# Altium PCB PCB_TEST.PcbDoc
Units mil, origin at the board's own origin, x right, y up, seen from the top; angles counter-clockwise.
Board outline 1410.03 x 1130.03 mil, 2 copper layers (Top Layer, Bottom Layer); 4 components, 2 nets, 10 pads, 0 vias.
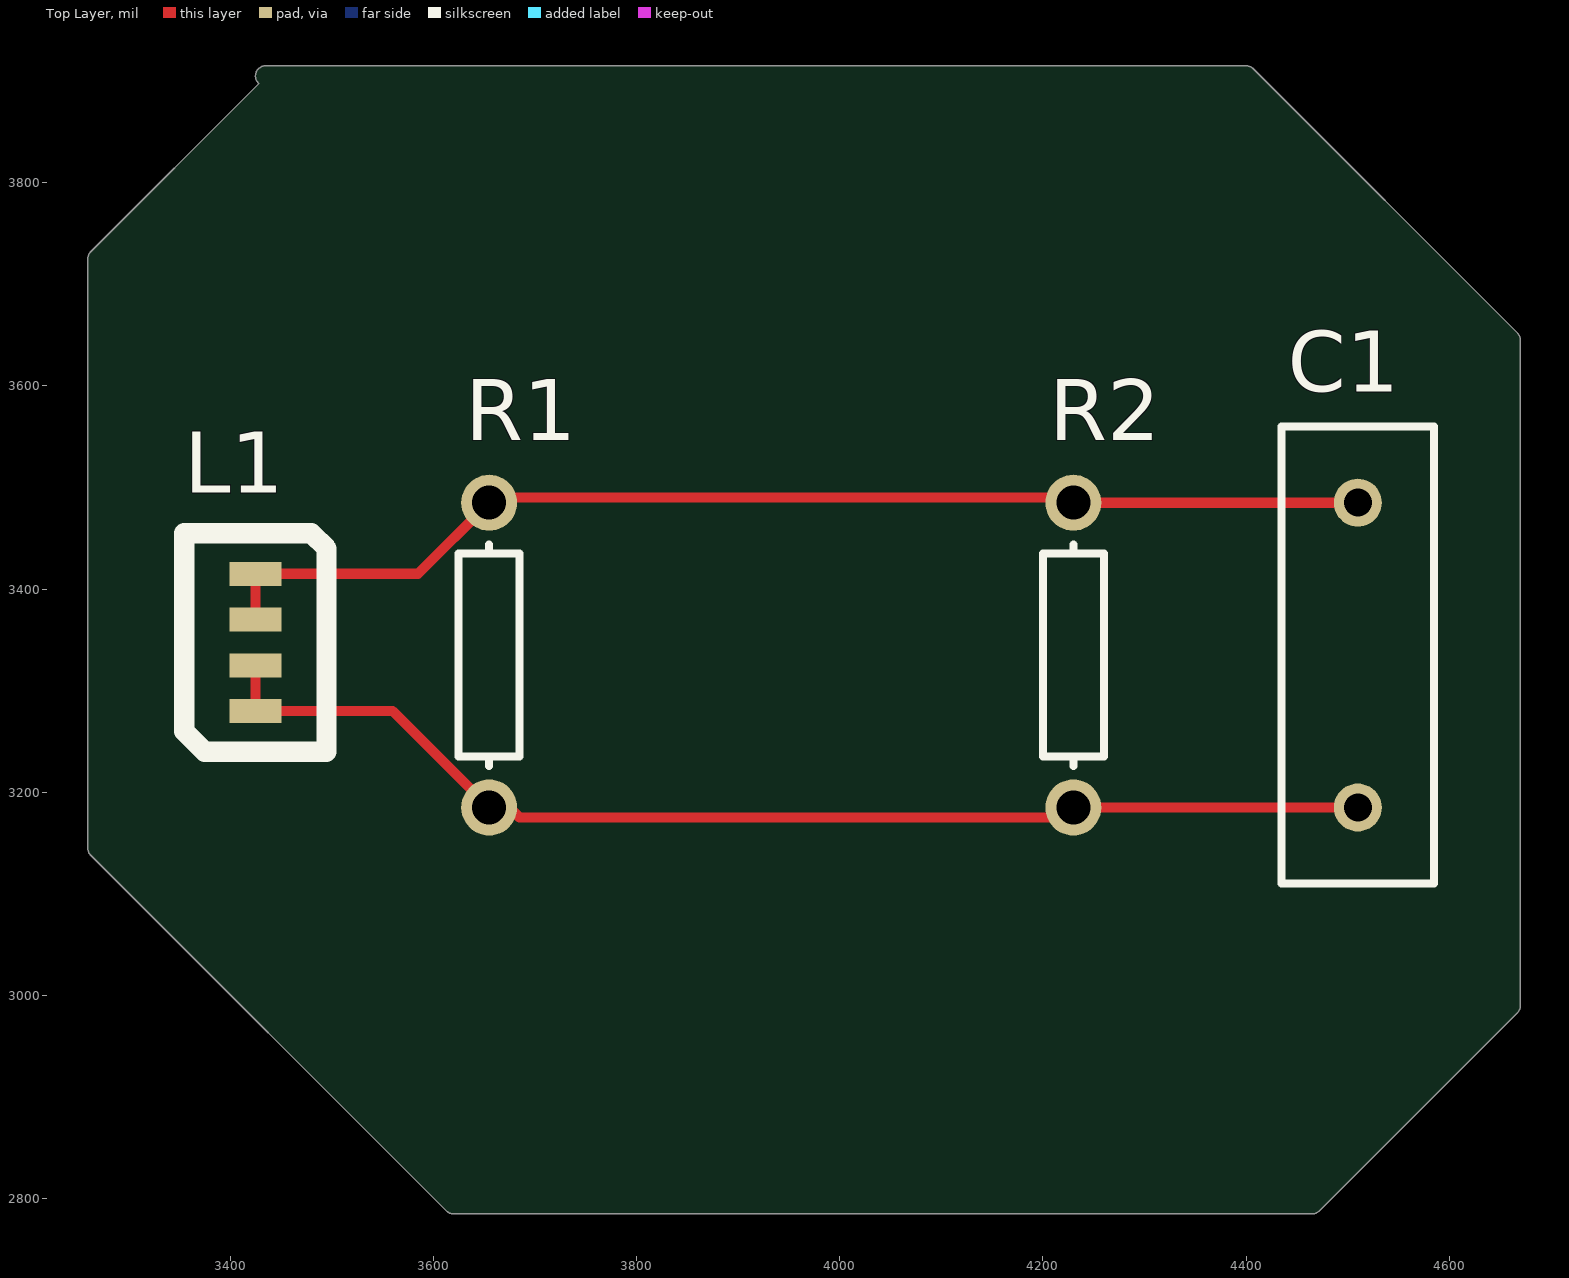
[diagram p0: Top Layer view]
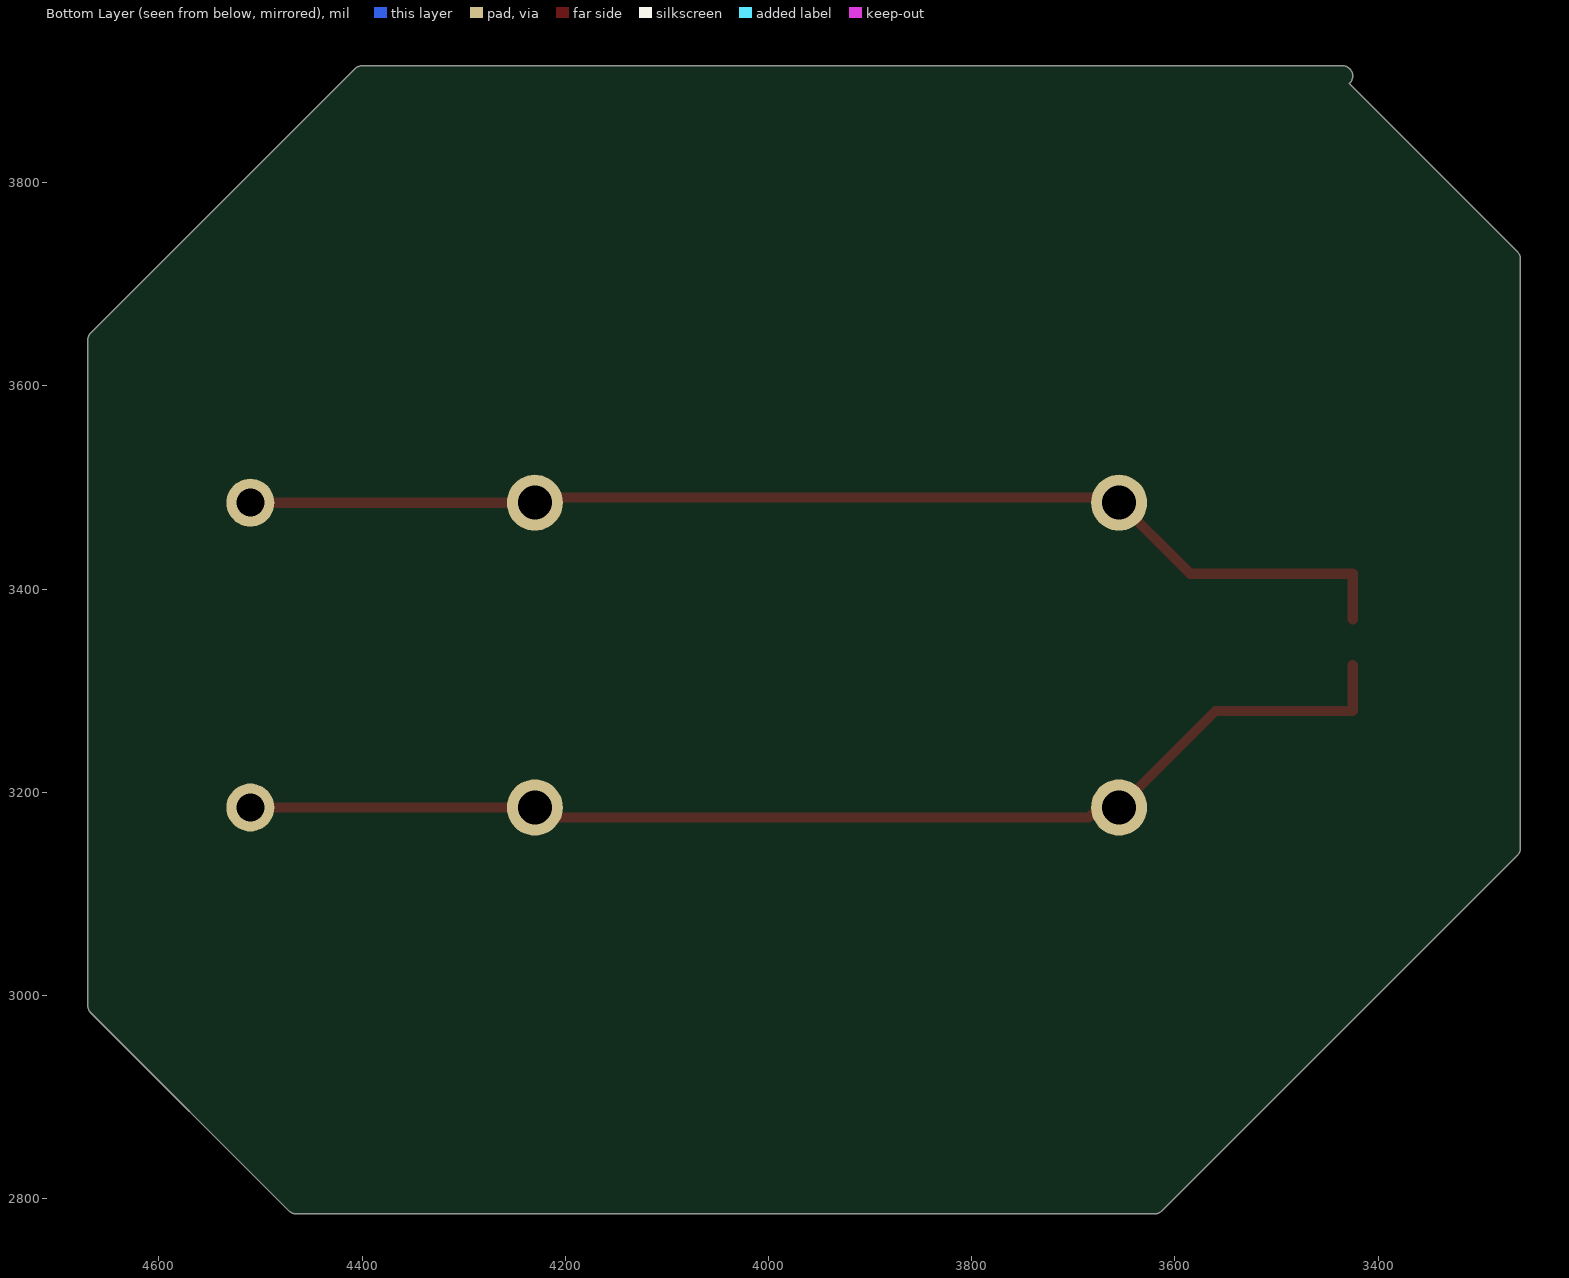
[diagram p1: Bottom Layer view, seen from below]

## Layer stack, top to bottom
Top Solder: solder mask 0.4, Solder Resist, Dk 3.5
Top Layer: signal copper 1.4
Dielectric 1: dielectric 12.6, FR-4, Dk 4.8
Bottom Layer: signal copper 1.4
Bottom Solder: solder mask 0.4, Solder Resist, Dk 3.5

## Board outline
3262.92,3137.92 cw(c3270,3145) 3259.99,3145 3259.99,3725 cw(c3270,3725) 3262.92,3732.08 3428.35,3897.51 cw(c3435,3905) 3435,3915.01 4400,3915.01 cw(c4400,3905) 4407.08,3912.08 4667.08,3652.08 cw(c4660,3645) 4670.02,3645 4670.02,2990 cw(c4660,2990) 4667.08,2982.92 4472.08,2787.92 cw(c4465,2795) 4465,2784.99 3620,2784.99 cw(c3620,2795) 3612.92,2787.92

## Design rules (kind name [scope] priority, off if disabled: settings)
Clearance [All] p1: gap=10 ignorepadtopadclearanceinfootprint=FALSE except(0: Arc-Hole Track-Hole SMDPad-Hole THPad-Hole Via-Hole Fill-Hole Poly-Hole Region-Hole Text-Hole)
PolygonConnect [All] p1: connectstyle=Relief reliefconductorwidth=10 reliefentries=4 polygonreliefangle="90 Angle" airgapwidth=10
RoutingVias [All] p1: holewidth=28 width=50 viastyle="Through Hole" minholewidth=28 minwidth=50 maxholewidth=28 maxwidth=50
SolderMaskExpansion [All] p1: expansion=4
Width [All] p1: maxlimit=10 minlimit=10 preferedwidth=10
30 further rules are at their usual default settings.

## Classes and differential pairs
component class Top: C1 L1 R1
component class Child: R2

## Components (designator, comment, footprint, x,y, rotation, side; value= is the part's Value field where it differs from the comment)
C1 "Cap" RAD-0.3 4510,3335 r270 top value=100pF
L1 "TestSymbol" PCBComponent_1 3360,3350 r180 top
R1 "Res1" AXIAL-0.3 3655,3335 r90 top value=1K
R2 "Res1" AXIAL-0.3 4230,3335 r90 top value=1K

## Footprints (in the part's own frame and the unit in brackets; to place one, negate y for a bottom-side part, rotate by r counter-clockwise, add the part's x,y. Pads: shape width x height; smd on the part's side, far side on the other; paste and mask are expansions set on the pad)
AXIAL-0.3 [mm] "Axial Device, Thru-Hole; 2 Leads; 0.3 in Pin Spacing"
  round 1.4 hole 0.85: 1(-3.81,0) 2(3.81,0)
  silkscreen extent -2.77,-0.76 2.77,0.76
PCBComponent_1 [mm]
  rect 1.3x0.6 smd: 4(-1.651,1.778) 5(-1.651,0.635) 6(-1.651,-0.508) 7(-1.651,-1.651)
  silkscreen extent -3.43,-2.67 0.13,2.79
RAD-0.3 [mm] "Radial Cap, Thru-Hole; 2 Leads; 0.3 in Pin Spacing"
  round 1.2 hole 0.7: 1(-3.81,0) 2(3.81,0)
  silkscreen extent -5.71,-1.91 5.71,1.91

## Part data
C1: "Capacitor", LatestRevisionDate=17-Jul-2002, LatestRevisionNote="Re-released for DXP Platform.", PackageDescription="Radial Cap, Thru-Hole; 2 Leads; 0.3 in Pin Spacing", PackageReference=RAD-0.3, Published=8-Jun-2000, Publisher="Altium Limited"
L1: library part Dankness
R1 R2: "Resistor", LatestRevisionDate=17-Jul-2002, LatestRevisionNote="Re-released for DXP Platform.", PackageDescription="Axial Device, Thru-Hole; 2 Leads; 0.3 in Pin Spacing", PackageReference=AXIAL-0.3, Published=8-Jun-2000, Publisher="Altium Limited"

## Nets (pads, with @x,y where several pads share a name; then routed paths per layer and width w, separated by ;. In a path a pad name is that pad's centre, name@x,y a point inside that pad or via, vN(x,y) a via of type N, cw(c..) or ccw(c..) an arc to the next point about the centre after c; other vN are vias at no path point)
GND: C1.2 L1.4 L1.5 R1.1 R2.1 | length 1170.6
  Top Layer w10: L1.5 L1.4 3560,3280 R1.1 ; R1.1@3670,3190 3685,3175 R2.1@4240,3175 ; R2.1 C1.2
NetC1_1: C1.1 L1.6 L1.7 R1.2 R2.2 | length 1146.1
  Top Layer w10: L1.6 L1.7 3585,3415 R1.2 ; R1.2@3670,3490 4225,3490 R2.2 C1.1

## Silkscreen, mask and mechanical layers (free items; w line width, h text height)
Mechanical 1:
  lines w20: 3435,3905 4400,3905 4660,3645 4660,2990 4465,2795 3620,2795 3270,3145 3270,3725 3440,3895 3445,3895